# Altium PCB PCB1.PcbDoc
Units mm, origin at the board's own origin, x right, y up, seen from the top; angles counter-clockwise.
Board outline 43.05 x 17.78 mm, 6 copper layers (Top Layer, Layer 3, Layer 1, Layer 2, Layer 4, Bottom Layer), stack 0.816 mm thick; 30 components, 43 nets, 163 pads, 27 vias.
Unrouted connection lines stored in the file: 18.
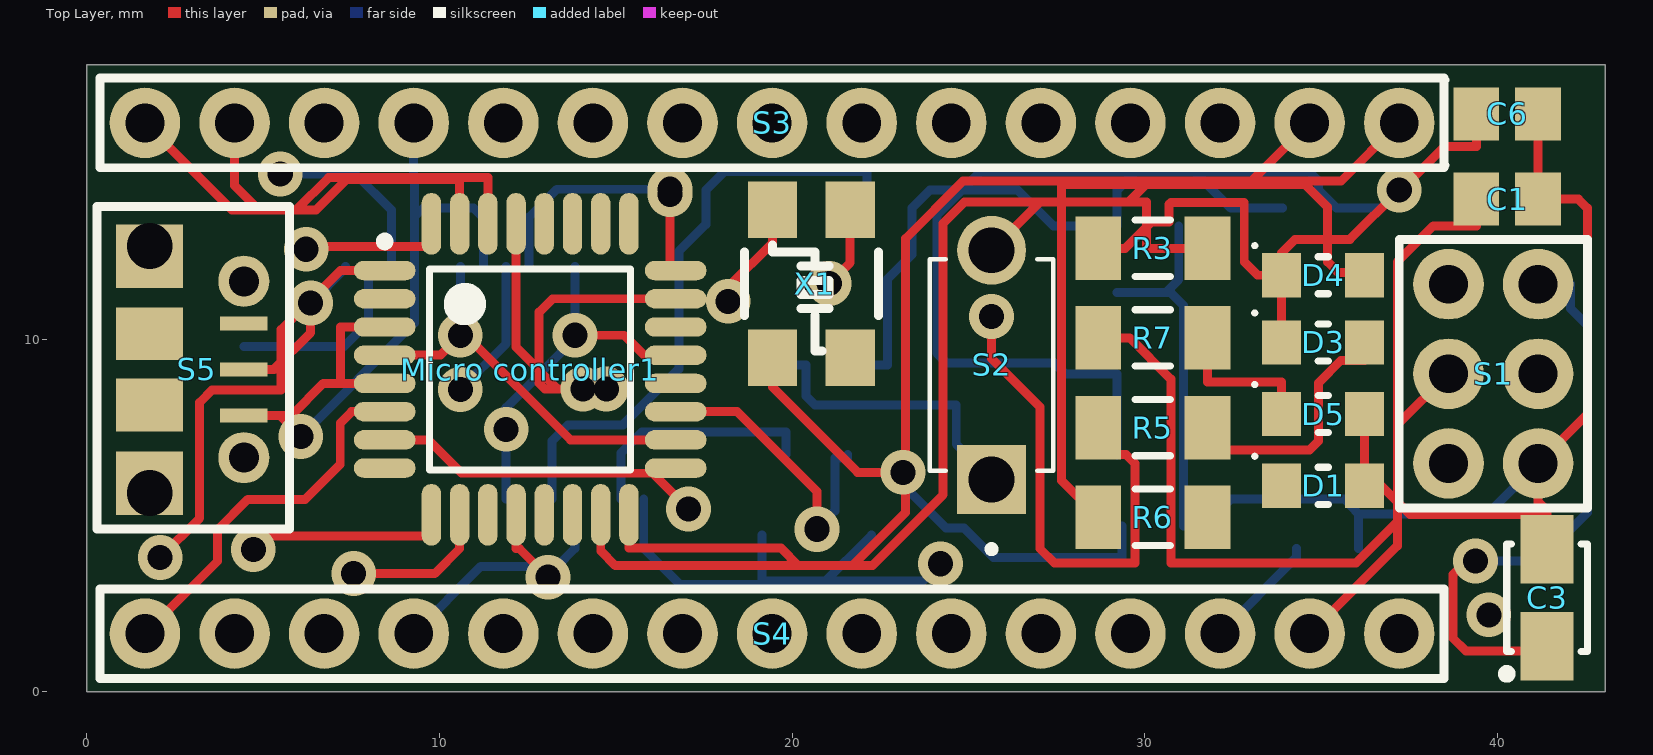
[diagram p0: Top Layer view]
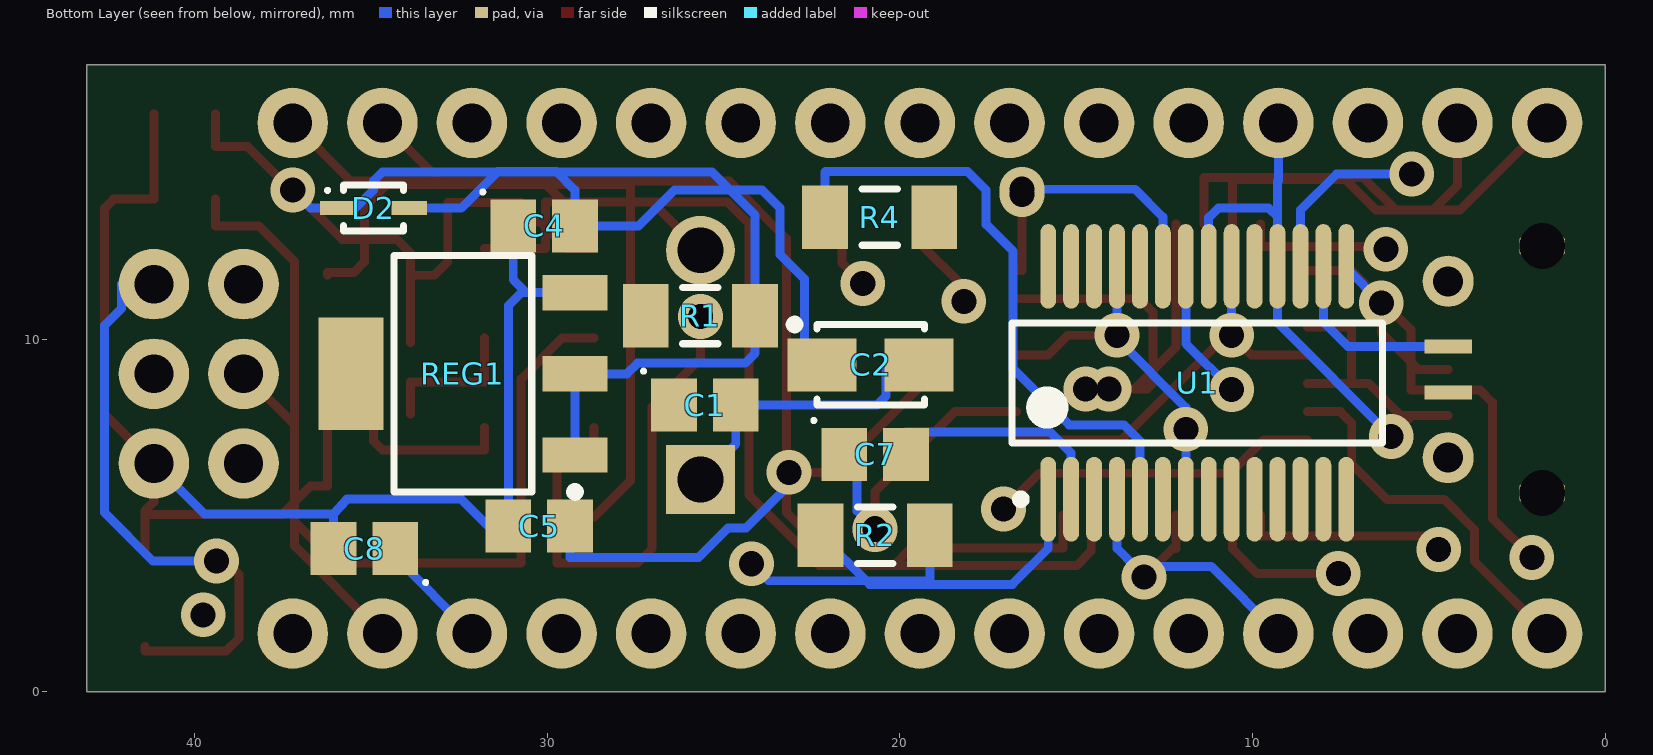
[diagram p1: Bottom Layer view, seen from below]
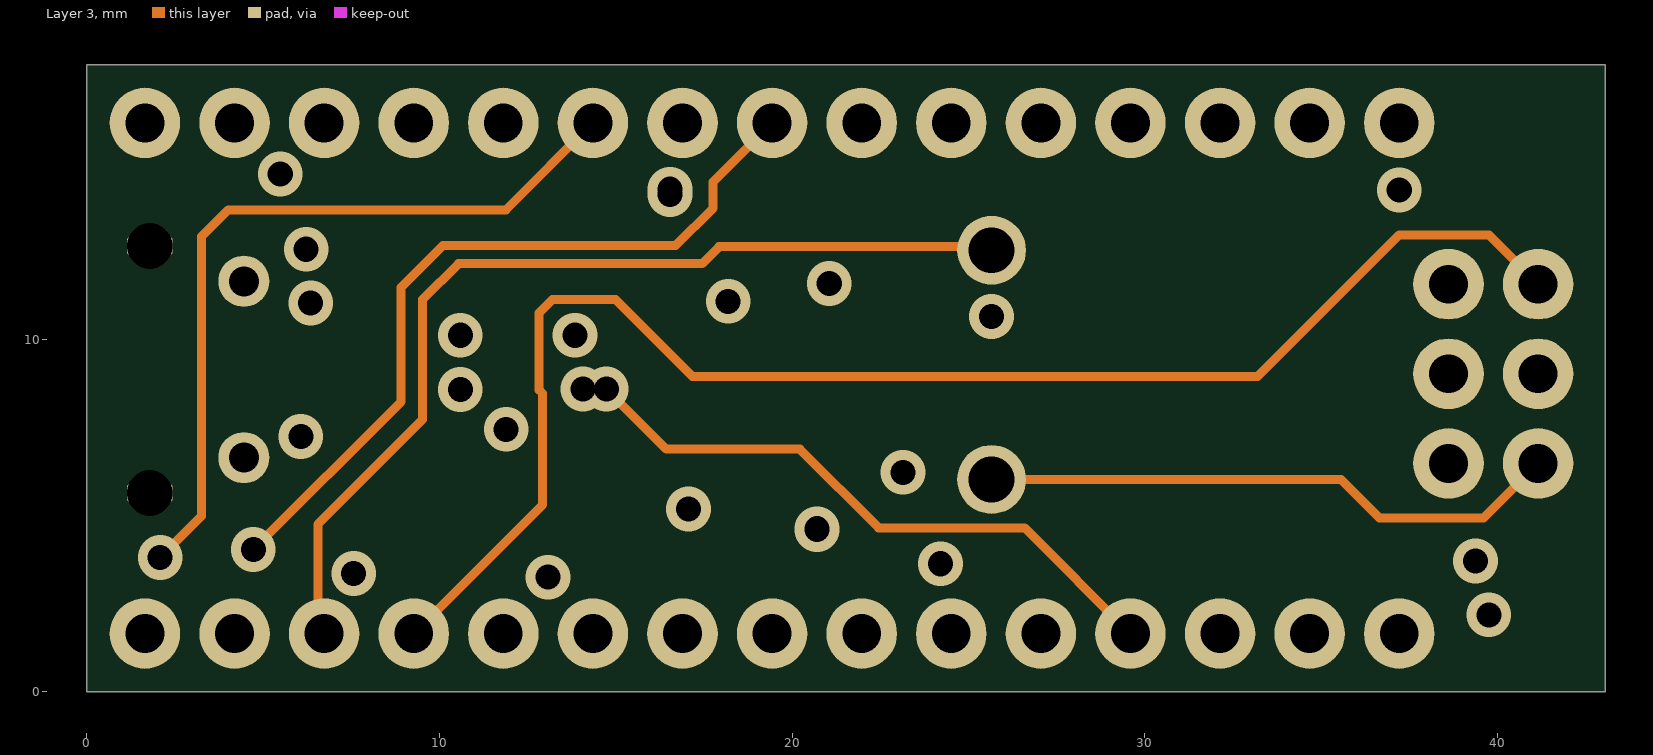
[diagram p2: Layer 3]
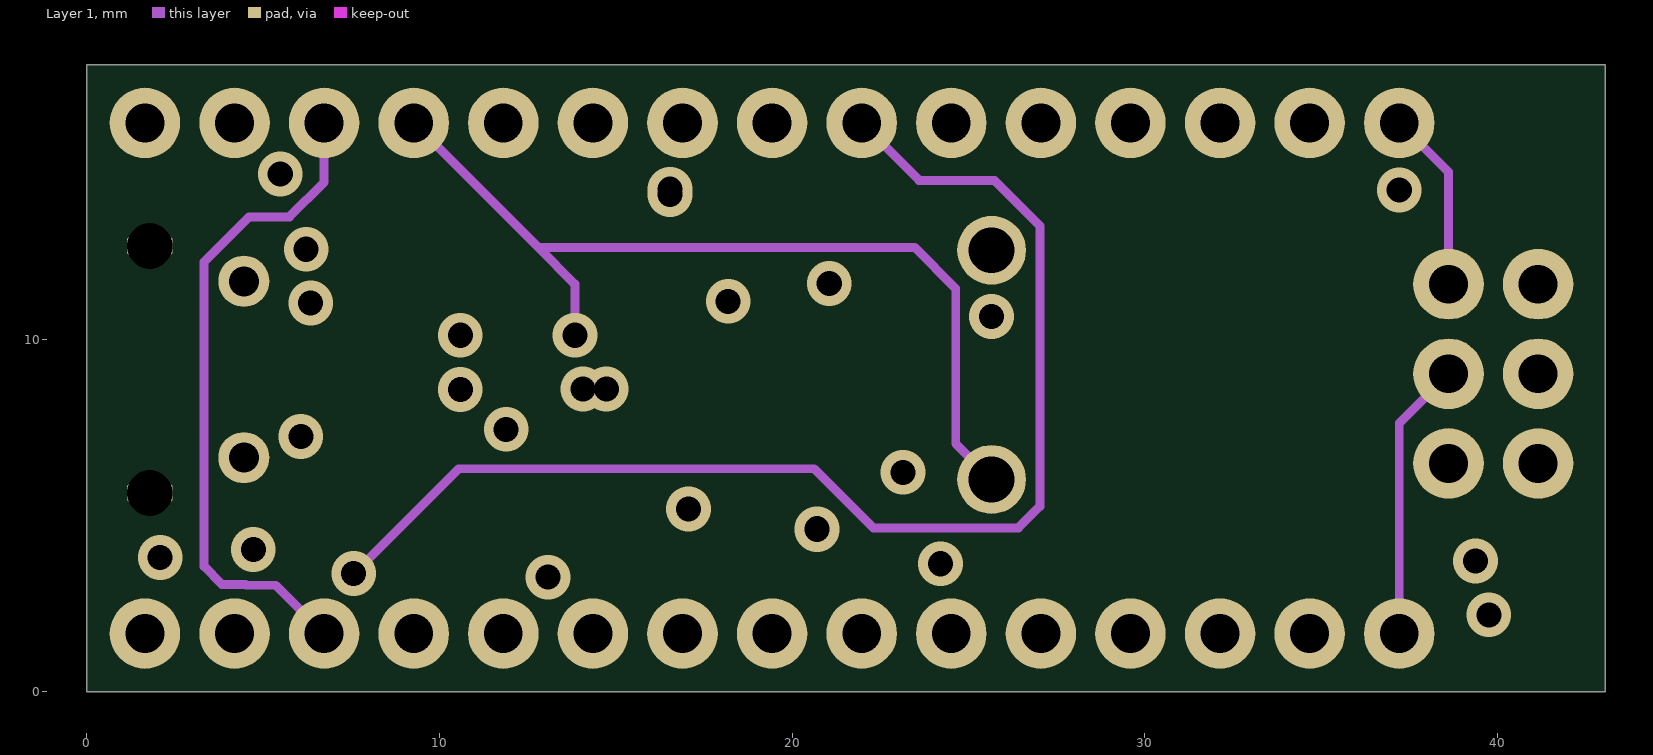
[diagram p3: Layer 1]
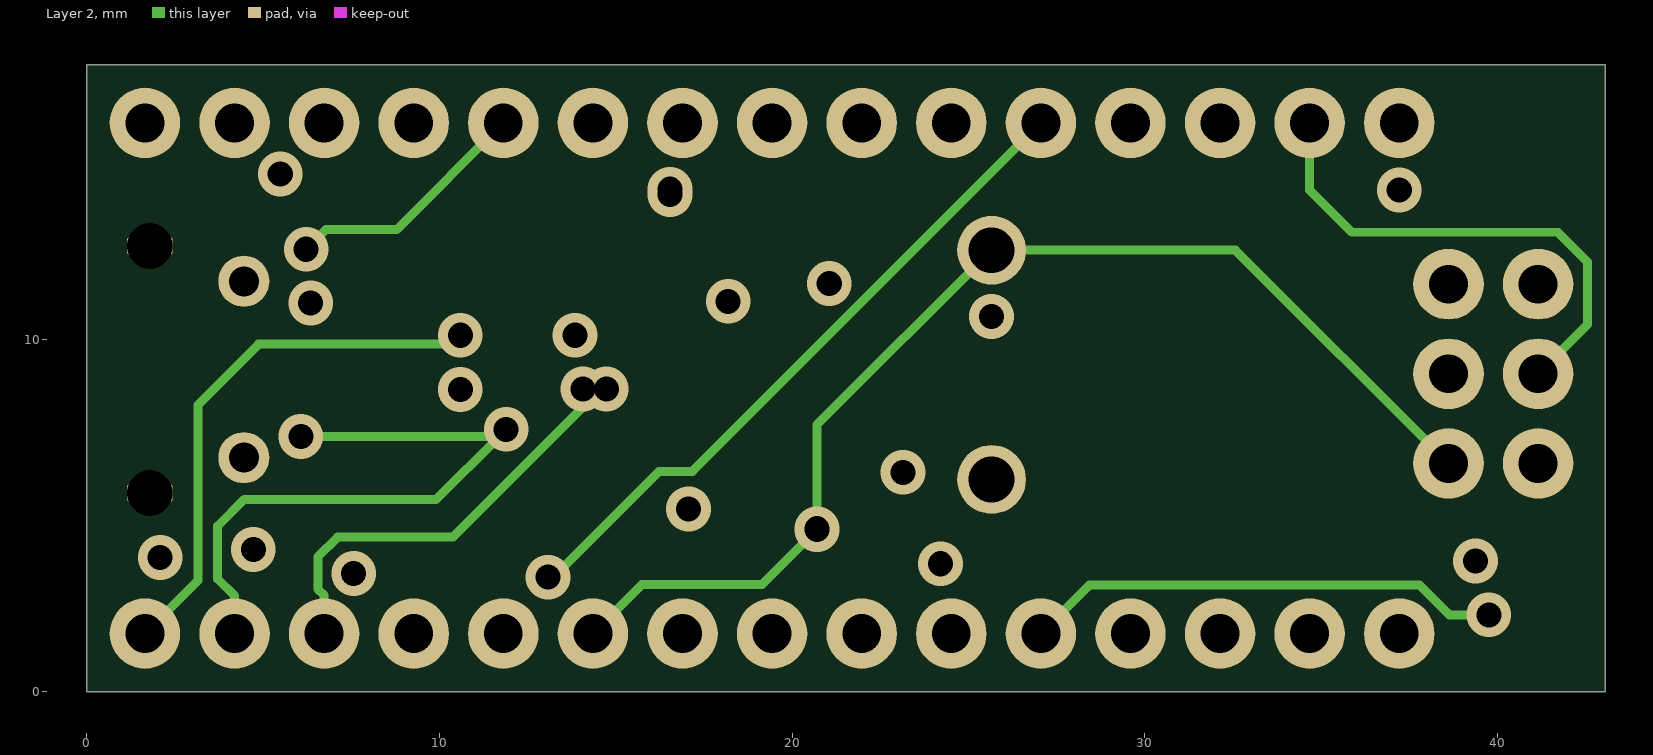
[diagram p4: Layer 2]
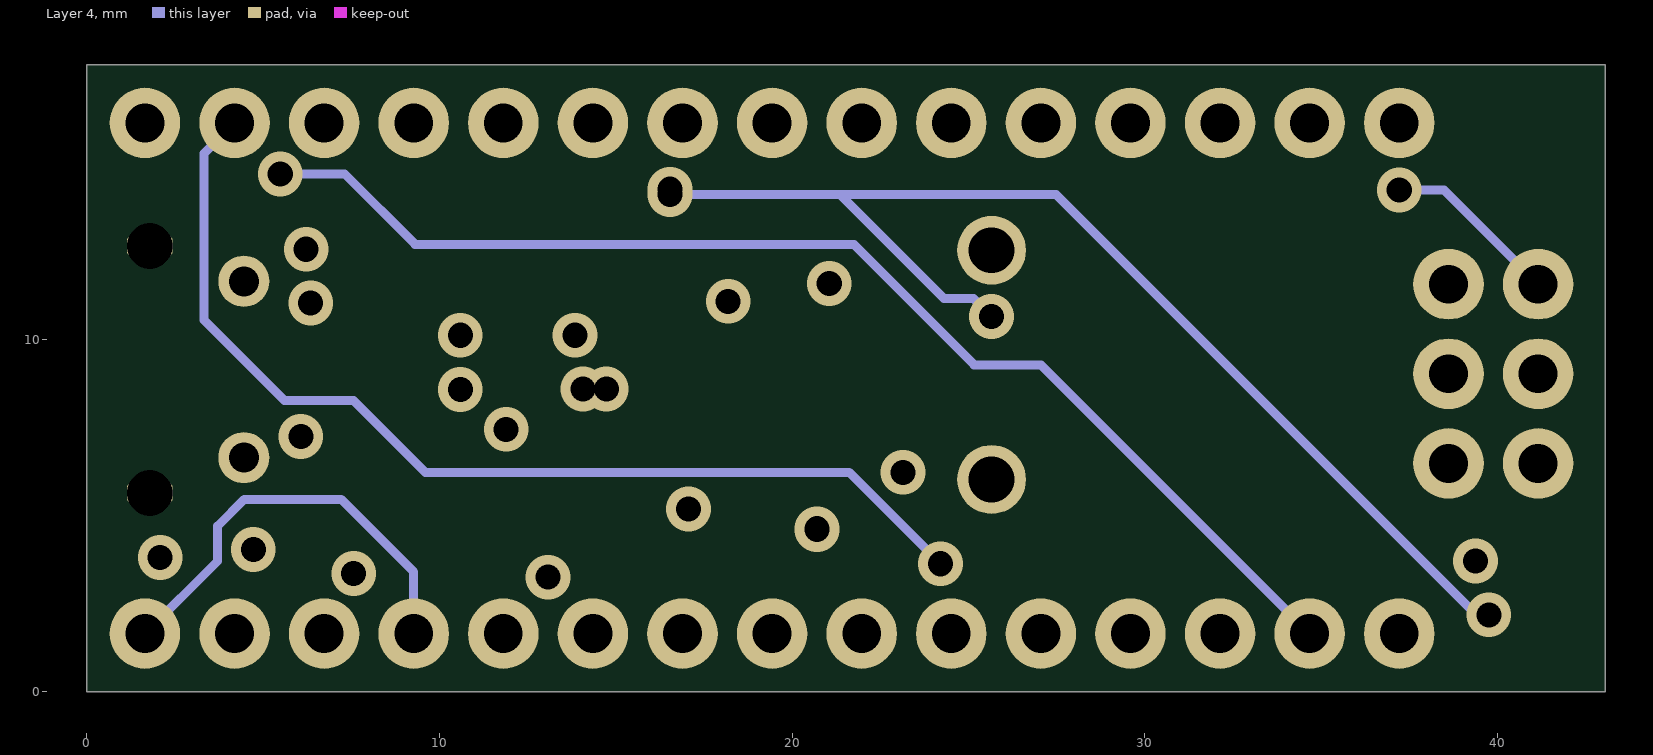
[diagram p5: Layer 4]

## Layer stack, top to bottom
Top Solder: solder mask 0.0102, Solder Resist, Dk 3.5
Top Layer: signal copper 0.0356
Dielectric 4: prepreg 0.0711, PP-006, Dk 4.1
Layer 3: signal copper 0.035
Dielectric 2: prepreg 0.0711, PP-006, Dk 4.1
Layer 1: signal copper 0.035
Dielectric 1: dielectric 0.32, FR-4, Dk 4.8
Layer 2: signal copper 0.035
Dielectric 3: prepreg 0.0711, PP-006, Dk 4.1
Layer 4: signal copper 0.035
Dielectric 5: prepreg 0.0711, PP-006, Dk 4.1
Bottom Layer: signal copper 0.0356
Bottom Solder: solder mask 0.0102, Solder Resist, Dk 3.5

## Board outline
0,0 0,17.78 43.053,17.78 43.053,0

## Design rules (kind name [scope] priority, off if disabled: settings)
Clearance [All] p1: gap=0.254 ignorepadtopadclearanceinfootprint=FALSE except(0: Arc-Hole Track-Hole SMDPad-Hole THPad-Hole Via-Hole Fill-Hole Poly-Hole Region-Hole Text-Hole)
PolygonConnect [All] p1: connectstyle=Relief reliefconductorwidth=0.254 reliefentries=4 polygonreliefangle="90 Angle" airgapwidth=0.254
RoutingVias [All] p1: holewidth=0.711 width=1.27 viastyle="Through Hole" minholewidth=0.711 minwidth=1.27 maxholewidth=0.711 maxwidth=1.27
SolderMaskExpansion [All] p1: expansion=0.102
Width [All] p1: maxlimit=0.254 minlimit=0.254 preferedwidth=0.254
30 further rules are at their usual default settings.

## Components (designator, comment, footprint, x,y, rotation, side; value= is the part's Value field where it differs from the comment)
C1 "C0805C180J5GACTU" CAPCP2012X09N 25.527,8.128 r180 bottom
C1 "100nF Ceramic Multilayer Capacitor_1" CAPCP2012X09N 40.271,13.97 r0 top
C2 "Capacitor SMT Tantalum" "CASE A - 3216X18" 20.828,9.271 r180 bottom value=4.7µF
C3 "Capacitor SMT Tantalum" "CASE A - 3216X18" 41.402,2.667 r90 top value=4.7µF
C4 "100nF Ceramic Multilayer Capacitor_1" CAPCP2012X09N 30.085,13.208 r180 bottom
C5 "C0805C180J5GACTU" CAPCP2012X09N 30.226,4.699 r180 bottom
C6 "100nF Ceramic Multilayer Capacitor_1" CAPCP2012X09N 40.271,16.383 r0 top
C7 "100nF Ceramic Multilayer Capacitor_1" CAPCP2012X09N 20.701,6.731 r180 bottom
C8 "100nF Ceramic Multilayer Capacitor_1" CAPCP2012X09N 35.179,4.064 r0 bottom
D1 "Kingbright Blue LED, 60 mcd 120 ° 0805" LED1913X12NBLUE 35.052,5.842 r0 top
D2 "Panasonic DB2J20900L Schottky Diode, 0.5A, 20V, 2.4ns, 2-Pin SMini2 F5 B" DIOM1712X07N 34.925,13.716 r180 bottom
D3 "Kingbright Red LED, 100 mcd 120 ° 0805" LED1913X12NRED 35.052,9.906 r0 top
D4 "Kingbright Green LED, 70 mcd 120 ° 0805" LED1913X12NGREEN 35.052,11.811 r0 top
D5 "Kingbright Red LED, 100 mcd 120 ° 0805" LED1913X12NRED 35.052,7.874 r0 top
"Micro controller1" "ATMEGA328P-AU" TQFP80P900X900X120-32N 12.573,9.144 r0 top
R1 "CRCW1206470RFKEA" RESC3216X60X45ML10T20 25.654,10.668 r0 bottom
R2 "CRCW1206470RFKEA" RESC3216X60X45ML10T20 20.701,4.445 r0 bottom
R3 "CRCW1206470RFKEA" RESC3216X60X45ML10T20 30.226,12.573 r180 top
R4 "CRCW1206470RFKEA" RESC3216X60X45ML10T20 20.574,13.462 r0 bottom
R5 "CRCW1206470RFKEA" RESC3216X60X45ML10T20 30.226,7.493 r180 top
R6 "CRCW1206470RFKEA" RESC3216X60X45ML10T20 30.226,4.953 r180 top
R7 "CRCW1206470RFKEA" RESC3216X60X45ML10T20 30.226,10.033 r180 top
REG1 "LM1117MP-5.0/NOPB, Low Dropout Voltage Regulator, 1.5A, 5 V ±1%, 4-Pin SOT-223" SOT230P700X180-4N 32.385,9.017 r0 bottom
S1 "Programming Headers Dual Row" "ISP HEADER" 52.705,29.21 r270 top
S2 "" SW_TL1107BF130WQ 25.654,9.271 r90 top
S3 "connector;str header;single row;.1 cont centers;.095 tail;gold or gtx;36 contact" Header 1.651,16.129 r0 top
S4 "connector;str header;single row;.1 cont centers;.095 tail;gold or gtx;36 contact" Header 1.651,1.651 r0 top
S5 "NewMolex Right Angle SMT Female Type B Micro USB Connector, 30 V ac, 1.8A" MicroUSB 4.456,10.37 r270 top
U1 "FT232RL, Universal Asynchronous Receiver & Transmitter 3MBd, 28-Pin, SSOP" SOP65P780X200-28N 11.568,8.761 r90 bottom
X1 "Aker 16MHz Crystal SMT" "Aker S5C Crystal" 19.444,13.668 r90 top value=16MHz

## Footprints (in the part's own frame and the unit in brackets; to place one, negate y for a bottom-side part, rotate by r counter-clockwise, add the part's x,y. Pads: shape width x height; smd on the part's side, far side on the other; paste and mask are expansions set on the pad)
"Aker S5C Crystal" [mm]
  rect 1.6x1.4 smd: 1(0,0) 2(-4.2,0) 3(0,-2.2) 4(-4.2,-2.2)
  round 0.254 on Top Overlay: 5(-3,-2.4)
  silkscreen extent -4,-3 -1,0.8, body extent -4.7,-2.8 0.5,0.6, height 1
CAPCP2012X09N [mm] "Chip Capacitor, 2-Leads, Body 2.00x1.25mm, IPC Medium Density"
  rect 1.3x1.5 smd: 1(-0.875,0) 2(0.875,0)
  silkscreen extent -1.79,0.91 -1.69,1.01, body extent -1.05,-0.57 0.95,0.68, height 0.78
"CASE A - 3216X18" [mm] "Molded Capacitor, 2-Leads, Body 3.2x1.6mm, IPC Medium Density"
  rect 1.95x1.5 smd: 1(-1.375,0) 2(1.375,0)
  silkscreen extent -2.28,-1.14 1.52,1.27, body extent -1.52,-0.76 1.65,0.84, height 1.77
DIOM1712X07N [mm] "Molded Diode, 2-Leads, Body 1.70x1.25mm, IPC Medium Density"
  rect 1x0.4 smd: 1(-1.016,0) 2(1.016,0)
  silkscreen extent -1.35,-0.65 0.85,0.65, body extent -0.9,-0.45 0.9,0.45, height 0.8
Header [mm] "SIL Header"
  round 2 hole 1.1: 1(0,0) 2(2.54,0) 3(5.08,0) 4(7.62,0) 5(10.16,0) 6(12.7,0) 7(15.24,0) 8(17.78,0) 9(20.32,0) 10(22.86,0) 11(25.4,0) 12(27.94,0) 13(30.48,0) 14(33.02,0) 15(35.56,0)
  silkscreen extent -1.27,-1.27 36.83,1.27, body extent -1.33,-1.35 36.93,1.35, height 8.6
"ISP HEADER" [mm] "SIL Header for programming"
  round 2 hole 1.1: 1(17.653,-14.097) 2(17.653,-11.557) 3(20.193,-14.097) 4(20.193,-11.557) 5(22.733,-14.097) 6(22.733,-11.557)
  silkscreen extent 16.38,-15.49 24,-10.16, body extent 16.38,-15.37 24,-10.29, height 8
LED1913X12NBLUE [mm] "LED 2-Leads, Body 1.90x1.32mm, IPC Medium Density"
  rect 1.1x1.25 smd: 1(-1.175,0) 2(1.175,0)
  silkscreen extent -1.99,-0.53 0.15,0.89, body extent -1,-0.62 1.02,0.62, height 1.1
LED1913X12NGREEN [mm] "LED 2-Leads, Body 1.90x1.32mm, IPC Medium Density"
  rect 1.1x1.25 smd: 1(-1.175,0) 2(1.175,0)
  silkscreen extent -1.99,-0.53 0.15,0.89, body extent -1.01,-0.62 1.01,0.63, height 1.1
LED1913X12NRED [mm] "LED 2-Leads, Body 1.90x1.32mm, IPC Medium Density"
  rect 1.1x1.25 smd: 1(-1.175,0) 2(1.175,0)
  silkscreen extent -1.99,-0.53 0.15,0.89, body extent -1.02,-0.43 1.04,0.47, height 0.85
MicroUSB [mm] "MicroUSB  Molex 5Pin"
  rect 0.4x1.35 smd: 1(-0.07,0) 3(1.23,0) 5(2.53,0)
  rect 0.4x1.35 smd far side: 2(0.58,0) 4(1.88,0)
  rrect50% 0.6x1.3 hole 1.3: ""(-2.27,-2.667) ""(-2.27,-2.667) ""(4.73,-2.667)
  rect 1.8x1.9 smd: ""(-1.98,-2.678) ""(4.45,-2.678)
  round 1.45 hole 0.85: ""(-1.27,0) ""(3.73,0)
  rect 1.5x1.9 smd: ""(0.218,-2.678) ""(2.242,-2.678)
  silkscreen extent -3.39,-4.17 5.75,1.3, body extent -2.83,-5.32 5.37,0.11, height 2.68
RESC3216X60X45ML10T20 [mm] "Chip Resistor, 2-Leads, Body 3.20x1.60mm, IPC Low Density"
  rect 1.3x1.8 smd: 1(-1.55,0) 2(1.55,0)
  silkscreen extent -0.5,-0.8 0.5,0.8, body extent -1.65,-0.85 1.65,0.85, height 0.6
SOP65P780X200-28N [mm] "SOP, 28-Leads, Body 10.20x5.30mm, Pitch 0.65mm, IPC Medium Density"
  oval 2.4x0.45 smd: 1(-3.3,4.225) 2(-3.3,3.575) 3(-3.3,2.925) 4(-3.3,2.275) 5(-3.3,1.625) 6(-3.3,0.975) 7(-3.3,0.325) 8(-3.3,-0.325) 9(-3.3,-0.975) 10(-3.3,-1.625) 11(-3.3,-2.275) 12(-3.3,-2.925) 13(-3.3,-3.575) 14(-3.3,-4.225) 15(3.3,-4.225) 16(3.3,-3.575) 17(3.3,-2.925) 18(3.3,-2.275) 19(3.3,-1.625) 20(3.3,-0.975) 21(3.3,-0.325) 22(3.3,0.325) 23(3.3,0.975) 24(3.3,1.625) 25(3.3,2.275) 26(3.3,2.925) 27(3.3,3.575) 28(3.3,4.225)
  silkscreen extent -3.42,-5.25 1.7,5.25, body extent -3.91,-5.1 3.91,5.1, height 2
SOT230P700X180-4N [mm] "SOT223, 4-Leads, Body 6.50x7.00mm (avg), Pitch 2.30mm, IPC Medium Density"
  rect 1.85x1 smd: 1(-3.175,2.3) 2(-3.175,0) 3(-3.175,-2.3)
  rect 1.85x3.2 smd: 4(3.175,0)
  silkscreen extent -3.3,-3.35 1.95,3.47, body extent -3.8,-3.12 3.29,3.38, height 1.65
SW_TL1107BF130WQ [mm]
  rect 1.95x1.95 / inner round 1.95 / far side rect 1.95x1.95 hole 1.3: 1(-3.25,0)
  round 1.95 hole 1.3: 2(3.25,0)
  silkscreen extent -5.32,-1.75 3,1.75, body extent -3.95,-1.75 3.95,1.75, height 5
TQFP80P900X900X120-32N [mm] "TQFP, 32-Leads, Body 7.00x7.00mm, Pitch 0.80mm, IPC Medium Density"
  oval 1.75x0.55 smd: 1(-4.125,2.8) 2(-4.125,2) 3(-4.125,1.2) 4(-4.125,0.4) 5(-4.125,-0.4) 6(-4.125,-1.2) 7(-4.125,-2) 8(-4.125,-2.8) 17(4.125,-2.8) 18(4.125,-2) 19(4.125,-1.2) 20(4.125,-0.4) 21(4.125,0.4) 22(4.125,1.2) 23(4.125,2) 24(4.125,2.8)
  oval 0.55x1.75 smd: 9(-2.8,-4.125) 10(-2,-4.125) 11(-1.2,-4.125) 12(-0.4,-4.125) 13(0.4,-4.125) 14(1.2,-4.125) 15(2,-4.125) 16(2.8,-4.125) 25(2.8,4.125) 26(2,4.125) 27(1.2,4.125) 28(0.4,4.125) 29(-0.4,4.125) 30(-1.2,4.125) 31(-2,4.125) 32(-2.8,4.125)
  silkscreen extent -4.25,-2.85 2.85,3.75, body extent -4.44,-4.5 4.56,4.5, height 1.6

## Part data
C1 C5: library part "18pF Ceramic Multilayer Capacitor, 50 V dc C0G Dielectric ±5% SMD", "18pF Ceramic Multilayer Capacitor, 50 V dc C0G Dielectric ±5% SMD", Capacitance=18pF, Manufacturer=Kemet, Package=0805, Voltage=50V, Creator="Ritesh Kanjee", Datasheet URL=http://za.rs-online.com/web/p/ceramic-multilayer-capacitors/6480935/?searchTerm=C0805C180J5GACTU&relevancy-data=636F3D3226696E3D4931384E4B6E6F776E41734D504E266C753D656E266D6D3D6D61746368616C6C7061727469616C26706D3D5E5B5C707B4C7D5C707B4E647D2D2C2F255C2E5D2B2426706F3D313326736E3D592673743D4D414E5F504152545F4E554D4245522677633D424F5448267573743D4330383035433138304A35474143545526, Date Created="18 February 2015", RS Stock No.=648-0935
C1 C4 C6 C7 C8: "AVX 0805 Standard 100nF Ceramic Multilayer Capacitor, 50 V dc X7R Dielectric ±10% SMD", Capacitance=100nF, Manufacturer=AVX, Package=0805, Voltage=50V, Creator="Ritesh Kanjee", Datasheet URL=http://za.rs-online.com/web/p/ceramic-multilayer-capacitors/4646688/, Date Created="18 February 2015", RS Stock No.=464-6688
C2 C3: library part "4.7µF Tant RS 496-3545", "Capacitor,tantalum,SMT,16V,4.7uF,10%,A-case", Package=3216-18, Tolerance=10%, Voltage=16V, ComponentLink1Description="Supplier Website", ComponentLink1URL=http://za.rs-online.com/web/search/searchBrowseAction.html?method=getProduct&R=4963545, ComponentLink2Description="RS Data sheet", ComponentLink2URL=http://docs-europe.origin.electrocomponents.com/webdocs/04ed/0900766b804ed4cc.pdf, LatestRevisionDate=28-April-2010, Part Originator="H Theron", Publisher=DPSS, RS Stock Nr.=496-3545
D1: Color=Blue, Forward Voltage=3.2V, Manufacturer=KingBright, Manufacturer Part No.=KP-2012PBC-A, Creator="Ritesh Kanjee", Datasheet URL=http://za.rs-online.com/web/p/visible-leds/4663784/, Date Created="18 February 2015", RS Stock No.=466-3784
D2: library part "Schottky Diode, 0.5A, 20V, 2.4ns, 2-Pin SMini2 F5 B", Manufacturer=Panasonic, Manufacturer Part No.=DB2J20900L, Maximum Continuous Forward Current=0.5A, Peak Reverse Repetitive Voltage=20V, Created By="R Kanjee", Datasheet=http://docs-europe.electrocomponents.com/webdocs/1398/0900766b813986b3.pdf, Date Created="1 March 2015", RS Stock No.=713-2703
D3 D5: Color=RED, Forward Voltage=1.85V, Manufacturer=KingBright, Manufacturer Part No.=KP-2012SRC-PRV, Creator="Ritesh Kanjee", Datasheet URL=http://za.rs-online.com/web/p/visible-leds/4663813/, Date Created="18 February 2015", RS Stock No.=466-3813
D4: Color=Green, Forward Voltage="2.1 V", Manufacturer=KingBright, Manufacturer Part No.=KP-2012MGC, Creator="Ritesh Kanjee", Datasheet URL=http://za.rs-online.com/web/p/visible-leds/4663778/, Date Created="18 February 2015", RS Stock No.=466-3778
"Micro controller1": "ATMEGA328P-AU, 8 bit AVR Microcontroller 20MHz 1 kB, 32 kB Flash, 2 kB RAM, I2C 32-Pin TQFP", Company="Lumina Inova", Created By="Ritesh Kanjee", Datasheet URL=http://docs-europe.electrocomponents.com/webdocs/0db4/0900766b80db4deb.pdf, Date Created="14 February 2015", RS Stock No.=696-3092
R1 R2 R3 R4 R5 R6 R7: library part CMP-2003-02206-1, Manufacturer="Vishay Dale", Part Number=CRCW1206470RFKEA
REG1: library part LM1117MP-5.0, Manufacturer="Texas Instruments", Maximum Input Voltage=15V, Output Voltage=5V, Supply Current=1.5Amps, Created By="R Kanjee", Datasheet URL=http://za.rs-online.com/web/p/low-dropout-voltage-regulators/5339583/, Date Created="26 February 2015", RS Stock No.=533-9583
S1: library part "Programming ISP, Programming Headers Dual Row", Current Rating="3Amps Continuous", Manufacturer=FCI, Manufacturer Part No.=68000-236HLF, Created By="R Kanjee", Date Created="1 March 2015", RS Stock No.=2509565626
S2: library part TL1107BF130WQ, "SWITCH TACTILE SPST-NO 0.05A 12V", Package=None, Availability="In Stock", Check_prices=https://www.snapeda.com/parts/TL1107BF130WQ/E-Switch/view-part/?ref=eda, MF=E-Switch, MP=TL1107BF130WQ, Price=None, Purchase-URL=https://pricing.snapeda.com/search/part/TL1107BF130WQ/?ref=eda, SnapEDA_Link=https://www.snapeda.com/parts/TL1107BF130WQ/E-Switch/view-part/?ref=snap
S3 S4: library part "Single row; PCB headers", Current Rating="3Amps Continuous", Manufacturer=FCI, Manufacturer Part No.=68000-236HLF, Created By="R Kanjee", Date Created="1 March 2015", RS Stock No.=2509565626
S5: library part "Micro USB Connector, 30 V ac, 1.8A", Manufacturer=Molex, Manufacturer Part No.=105017-0001, Max Current=1.8A, Max Voltage=30V, Creator="R Kanjee", Datasheet URL=http://za.rs-online.com/web/p/micro-usb-connectors/8486764/, Date Created="28 February 2015", RS Stock No=848-6764
U1: library part "FT232RL USB to UART, Universal Asynchronous Receiver & Transmitter 3MBd, 28-Pin, SSOP", Manufacturer="FTDI Chip", Manufacturer Part No.=FT232RL, Creator="R Kanjee", Date Created="03 March 2015", Pin Count=28, RS Stock No.=406-580
X1: library part "Aker  C5S-16.000-12-3030-X", "Aker S5C SMT Crystal", Frequency Stability=+/-30ppm, Load Capacitance=12pF, Manufacturer=Aker, Manufacturer Part #=C5S-16.000-12-3030-X, Package="3.2x5mm SMD", Creator="R Kanjee", HelpURL=http://za.rs-online.com/web/p/crystal-units/6719488/, RS="RS 671-9488", RS Stock Nr.=671-9488, Supplier=RS

## Via types
v1: diameter 1.27, hole 0.711, Top Layer to Bottom Layer, 27 vias

## Nets (pads, with @x,y where several pads share a name; then routed paths per layer and width w, separated by ;. In a path a pad name is that pad's centre, name@x,y a point inside that pad or via, vN(x,y) a via of type N, cw(c..) or ccw(c..) an arc to the next point about the centre after c; other vN are vias at no path point)
3.3V: C1.1@39.396,13.97 S4.14 U1.17 | length 54.8
  Top Layer w0.254: S4.14 37.16,4.14 37.16,12.192 38.176,13.208 39.396,13.208 C1.1@39.396,13.97
  Layer 4 w0.254: v1(5.486,14.681) 7.313,14.681 9.31,12.684 21.748,12.684 25.161,9.271 27.051,9.271 S4.14
  Bottom Layer w0.254: v1(5.486,14.681) 7.62,14.681 8.643,13.658 U1.17
+5: "Micro controller1.4" "Micro controller1.6" "Micro controller1.18" C3.1 C6.1 D2.1 D3.1 D4.1 R1.1 R3.2 REG1.1 REG1.2 S1.2 S4.1 S4.4 U1.4 U1.20 | length 165.2
  Top Layer w0.254: S4.1 3.708,3.708 3.708,4.596 4.572,5.46 6.196,5.46 7.188,6.452 7.188,7.62 7.512,7.944 8.448,7.944 ; 8.448,9.544 10.027,9.544 v1(10.592,10.109) 10.751,10.109 13.716,7.144 16.698,7.144 ; R3.2 29.439,12.573 30.183,13.317 30.683,13.317 30.683,13.817 30.734,13.868 32.817,13.868 32.817,12.192 33.198,11.811 D4.1 ; D3.1 D4.1 ; v1(39.37,3.708) 39.116,3.708 38.735,3.327 38.735,1.524 39.097,1.162 41.402,1.162 C3.1 ; C6.1 39.396,15.457 38.492,15.457 37.259,14.224 v1(37.211,14.224) 35.814,12.827 34.258,12.827 33.877,12.446 D4.1
  Layer 2 w0.254: S4.1 3.15,3.15 3.15,8.128 4.877,9.855 10.338,9.855 v1(10.592,10.109)
  Layer 3 w0.254: S4.4 12.929,5.309 12.929,8.458 12.827,8.56 12.827,10.744 13.208,11.125 14.986,11.125 17.17,8.941 33.198,8.941 37.211,12.954 39.751,12.954 S1.2
  Layer 4 w0.254: S4.1 3.708,3.708 3.708,4.699 4.469,5.46 7.215,5.46 9.271,3.404 S4.4 ; v1(37.211,14.224) 38.481,14.224 S1.2
  Bottom Layer w0.254: S4.4 11.176,3.556 13.335,3.556 13.843,4.064 U1.4 ; v1(10.592,10.109) v1(10.592,10.109) U1.20 ; REG1.1 REG1.2 27.737,9.017 27.432,9.322 24.384,9.322 24.104,9.602 R1.1 24.104,13.512 25.324,14.732 34.671,14.732 34.925,14.478 34.925,14.224 35.433,13.716 D2.1 36.703,13.716 v1(37.211,14.224) ; v1(39.37,3.708) 41.173,3.708 42.545,5.08 42.545,10.389 42.062,10.871 42.062,11.557 S1.2
A0: "Micro controller1.23" S4.12 | length 25.7
  Top Layer w0.254: v1(14.732,8.585) 12.993,8.585 12.827,8.751 12.827,10.763 13.208,11.144 16.698,11.144
  Layer 3 w0.254: v1(14.732,8.585) 16.434,6.883 20.218,6.883 22.454,4.648 26.594,4.648 S4.12
A1: "Micro controller1.24" S4.11 | length 44.1
  Top Layer w0.254: v1(16.535,14.097) 16.535,11.944 16.698,11.944
  Layer 2 w0.254: S4.11 28.432,3.032 37.783,3.032 38.631,2.184 v1(39.751,2.184)
  Layer 4 w0.254: v1(16.535,14.097) 27.483,14.097 39.395,2.184 v1(39.751,2.184)
A2: "Micro controller1.25" S4.10
A3: "Micro controller1.26" S4.9
"A4 / SDA": "Micro controller1.27" S4.8
"A5 / SCL": "Micro controller1.28" S4.7
A6: "Micro controller1.19" S4.6 | length 13.6
  Top Layer w0.254: 16.698,7.944 18.44,7.944 20.701,5.683 v1(20.701,4.597)
  Layer 2 w0.254: S4.6 15.748,3.048 19.152,3.048 v1(20.701,4.597)
A7: "Micro controller1.22" S4.5
AREF: "Micro controller1.20" C8.1 S4.13 | length 3.3
  Bottom Layer w0.254: S4.13 34.304,3.824 C8.1
D0/RX: "Micro controller1.30" R2.1 S3.2 | length 47.2
  Top Layer w0.254: S3.2 4.191,14.351 4.877,13.665 5.944,13.665 6.858,14.58 11.373,14.58 11.373,13.269
  Layer 4 w0.254: S3.2 3.327,15.265 3.327,10.541 5.613,8.255 7.569,8.255 9.601,6.223 21.615,6.223 v1(24.206,3.632)
  Bottom Layer w0.254: R2.1 19.151,3.15 23.724,3.15 v1(24.206,3.632)
D1/TX: "Micro controller1.31" R4.1 S3.1 | length 11.6
  Top Layer w0.254: S3.1 4.115,13.665 6.502,13.665 7.366,14.529 10.573,14.529 10.573,13.269
D2: "Micro controller1.32" S3.5 | length 11.3
  Top Layer w0.254: v1(6.223,12.548) 6.299,12.624 9.773,12.624 9.773,13.269
  Layer 2 w0.254: v1(6.223,12.548) 6.782,13.106 8.788,13.106 S3.5
"D3 PWM": "Micro controller1.1" S3.6 | length 34.7
  Top Layer w0.254: v1(2.083,3.81) 3.2,4.928 3.2,8.203 3.556,8.559 5.512,8.559 5.512,10.268 7.188,11.944 8.448,11.944
  Layer 3 w0.254: v1(2.083,3.81) 3.251,4.978 3.251,12.903 4.013,13.665 11.887,13.665 S3.6
D4: "Micro controller1.2" S3.7
D5PWM: "Micro controller1.9" S3.8 | length 27.9
  Top Layer w0.254: v1(4.724,4.039) 5.105,4.42 9.773,4.42 9.773,5.019
  Layer 3 w0.254: v1(4.724,4.039) 8.915,8.23 8.915,11.466 10.099,12.649 16.692,12.649 17.759,13.716 17.759,14.457 S3.8
D6PWM: "Micro controller1.10" S3.9 | length 40.1
  Top Layer w0.254: v1(7.569,3.353) 9.862,3.353 10.573,4.064 10.573,5.019
  Layer 1 w0.254: v1(7.569,3.353) 10.541,6.325 20.625,6.325 22.301,4.648 26.416,4.648 27.026,5.258 27.026,13.208 25.73,14.503 23.597,14.503 S3.9
D7: "Micro controller1.11" S3.10
D8: "Micro controller1.12" S3.11 | length 21.5
  Top Layer w0.254: 12.173,5.019 12.173,4.064 12.268,4.064 v1(13.081,3.251)
  Layer 2 w0.254: v1(13.081,3.251) 13.233,3.251 16.231,6.248 17.17,6.248 S3.11
D9PWM: "Micro controller1.13" S3.12
D10: "Micro controller1.14" S3.13
D11/PWMMOSI: "Micro controller1.15" S1.4 S3.14 | length 45.4
  Top Layer w0.254: 14.573,5.019 14.573,3.994 14.986,3.581 22.276,3.581 24.282,5.588 24.282,13.284 24.892,13.894 29.54,13.894 30.124,14.478 33.02,14.478 S3.14
  Layer 2 w0.254: S3.14 34.671,14.224 35.865,13.03 41.707,13.03 42.545,12.192 42.545,10.414 S1.4
D12/MISO: "Micro controller1.16" S1.1 S3.15 | length 37.9
  Top Layer w0.254: 15.373,5.019 15.373,4.076 19.685,4.076 20.18,3.581 21.71,3.581 23.216,5.087 23.216,12.852 24.841,14.478 35.56,14.478 S3.15
  Layer 1 w0.254: S3.15 38.608,14.732 S1.1
"D13 / SCK": "Micro controller1.17" R7.2 S1.3 S4.15 | length 27.4
  Top Layer w0.254: R7.2 29.566,10.033 30.734,8.865 30.734,3.658 35.992,3.658 37.16,4.826 37.16,7.569 S1.3
  Layer 1 w0.254: S4.15 37.211,7.62 S1.3
GND: "Micro controller1.3" "Micro controller1.5" "Micro controller1.21" C1.2 C2.2 C3.2 C4.1 C5.1 C6.2 C8.2 D1.2 D5.2 REG1.3 S1.6 S2.1 S3.4 S4.2 S5.5 U1.7 U1.18 U1.21 U1.25 | length 146.2
  Top Layer w0.254: S5.5 5.47,7.84 ; v1(6.071,7.239) 5.47,7.84 ; 8.448,8.744 7.192,8.744 ; 8.448,10.344 7.192,10.344 7.192,8.744 ; v1(13.843,10.109) 15.24,10.109 15.805,9.544 16.698,9.544 ; D5.2 D1.2 36.703,5.842 37.516,5.029 41.402,5.029 ; C6.2 41.146,15.164 41.146,13.97 42.291,13.97 42.545,13.716 42.545,7.874 S1.6 41.148,5.385 41.402,5.131 41.402,5.029 ; C3.2 41.402,5.029 ; 5.47,7.84 5.809,7.84 6.713,8.744 7.192,8.744
  Layer 1 w0.254: S3.4 12.802,12.598 ; v1(13.843,10.109) 13.843,11.557 12.802,12.598 ; S2.1 24.638,7.037 24.638,11.43 23.47,12.598 12.802,12.598
  Layer 2 w0.254: S4.2 4.191,2.718 3.708,3.2 3.708,4.699 4.469,5.46 9.91,5.46 v1@11.69,7.239 ; v1(6.071,7.239) v1@11.69,7.239 ; v1(11.893,7.442) v1@11.69,7.239
  Layer 3 w0.254: S2.1 35.559,6.021 36.652,4.928 39.599,4.928 S1.6
  Bottom Layer w0.254: v1(6.071,7.239) 9.293,10.461 U1.18 9.293,13.462 ; S3.4 9.271,14.5 9.293,14.478 9.293,13.462 ; U1.21 11.243,13.446 10.973,13.716 9.547,13.716 9.293,13.462 ; U1.7 v1(11.893,7.442) 11.893,8.058 13.843,10.008 v1(13.843,10.109) U1.25 ; C2.2 20.396,9.271 20.396,8.382 20.65,8.128 24.652,8.128 24.652,7.023 S2.1 ; REG1.3 30.593,11.317 ; C4.1 30.96,11.684 30.593,11.317 ; C8.2 36.054,5.039 ; S1.6 39.71,5.039 36.054,5.039 ; 30.593,11.317 30.734,11.317 31.101,10.95 C5.1 31.674,4.699 32.436,5.461 35.673,5.461 36.054,5.039
NetC1_1: C1.1@26.402,8.128 X1.3 | length 2.3
  Top Layer w0.254: v1(21.052,11.58) 21.644,12.172 X1.3
NetC5_2: C5.2 X1.2 | length 13.8
  Top Layer w0.254: X1.2 19.444,8.636 21.857,6.223 v1(23.139,6.223)
  Bottom Layer w0.254: v1(23.139,6.223) 23.139,5.867 24.359,4.648 24.867,4.648 25.705,3.81 29.351,3.81 C5.2
NetC7_2: C7.2 U1.2 | length 6.9
  Bottom Layer w0.254: U1.2 15.143,6.767 15.748,7.372 19.826,7.372 C7.2
NetD1_1: D1.1 R1.2
NetD3_2: D3.2 R5.1 | length 7.6
  Top Layer w0.254: R5.1 31.776,6.858 34.671,6.858 34.925,7.112 34.925,8.763 35.56,9.398 36.227,9.398 D3.2
NetD4_2: D4.2 R6.2 | length 20.5
  Top Layer w0.254: R6.2 27.635,5.994 27.635,14.376 34.544,14.376 35.179,13.741 35.179,12.192 35.484,11.887 36.227,11.887 D4.2
NetD5_1: D5.1 R7.1 | length 4.3
  Top Layer w0.254: R7.1 31.776,8.788 33.877,8.788 D5.1
NetR5_2: R5.2 U1.23 | length 31.2
  Top Layer w0.254: v1(25.654,10.643) 25.654,9.449 27.026,8.077 27.026,4.064 27.432,3.658 29.718,3.658 29.718,6.477 29.464,6.731 28.676,6.731 R5.2
  Layer 4 w0.254: v1(16.535,14.249) 16.535,14.097 21.361,14.097 24.308,11.151 25.146,11.151 v1(25.654,10.643)
  Bottom Layer w0.254: U1.23 12.543,13.462 13.33,14.249 v1(16.535,14.249)
NetR6_1: R6.1 U1.22 | length 4
  Bottom Layer w0.254: v1(10.593,8.575) 11.893,9.875 U1.22
NetS5_2: S5.2 U1.16 | length 5.4
  Bottom Layer w0.254: S5.2 7.293,9.79 7.993,10.49 U1.16
NetS5_3: S5.3 U1.15 | length 4.6
  Top Layer w0.254: S5.3 5.305,9.14 6.35,10.185 v1(6.35,11.024)
  Bottom Layer w0.254: v1(6.35,11.024) 7.343,12.017 U1.15
RESET: "Micro controller1.29" C7.1 R3.1 S1.5 S2.2 S3.3 S4.3 | length 100.4
  Top Layer w0.254: 12.173,13.269 12.173,9.773 13.361,8.585 v1(14.072,8.585) ; S2.2 27.027,13.894 30.048,13.894 30.048,12.573 R3.1
  Layer 1 w0.254: S4.3 5.359,3.023 4.521,3.023 4.496,3.048 3.835,3.048 3.327,3.556 3.327,12.192 4.604,13.468 5.747,13.468 6.731,14.453 S3.3
  Layer 2 w0.254: S4.3 6.731,2.737 6.553,2.915 6.553,3.829 7.112,4.388 10.382,4.388 14.072,8.077 v1(14.072,8.585) ; v1(20.701,4.623) 20.701,7.568 S2.2 32.564,12.521 S1.5
  Layer 3 w0.254: S4.3 6.553,1.829 6.553,4.75 9.525,7.722 9.525,11.125 10.541,12.141 17.45,12.141 17.932,12.624 25.551,12.624 S2.2
  Bottom Layer w0.254: v1(20.701,4.623) 21.209,5.131 21.209,6.629 21.576,6.629 C7.1
Rx: R2.2 U1.1 | length 8.9
  Bottom Layer w0.254: U1.1 15.793,4.064 16.809,3.048 20.854,3.048 R2.2
Tx: R4.2 U1.5 | length 17.5
  Bottom Layer w0.254: U1.5 13.193,7.112 13.65,7.569 15.2,7.569 16.789,9.159 16.789,12.491 17.553,13.254 17.553,14.224 18.077,14.748 22.108,14.748 22.124,14.732 R4.2
V-USB: C2.1 C4.2 D2.2 S5.1 | length 18
  Bottom Layer w0.254: C2.1 22.708,9.271 22.708,11.709 23.393,12.395 23.393,13.716 23.901,14.224 26.391,14.224 27.407,13.208 C4.2 29.21,14.224 29.734,14.748 31.404,14.748 32.436,13.716 D2.2
XTAL1: "Micro controller1.7" X1.1 | length 12.5
  Top Layer w0.254: 8.448,7.144 9.682,7.144 10.629,6.198 16.047,6.198 v1(17.063,5.182) ; v1(18.186,11.072) 18.186,11.479 19.444,12.737 X1.1
XTAL2: "Micro controller1.8" X1.4
pads on no net: REG1.4 S5. S5.4 U1.3 U1.6 U1.8 U1.9 U1.10 U1.11 U1.12 U1.13 U1.14 U1.19 U1.24 U1.26 U1.27 U1.28 X1.5

## Silkscreen, mask and mechanical layers (free items; w line width, h text height)
Mechanical 1:
  the board outline again, w0.5